# Altium PCB TSAL_Dummy.PcbDoc
Units mm, origin at the board's own origin, x right, y up, seen from the top; angles counter-clockwise.
Board outline 40.03 x 40.03 mm, 2 copper layers (Top Layer, Bottom Layer), stack 1.57 mm thick; 28 components, 20 nets, 72 pads, 4 vias.
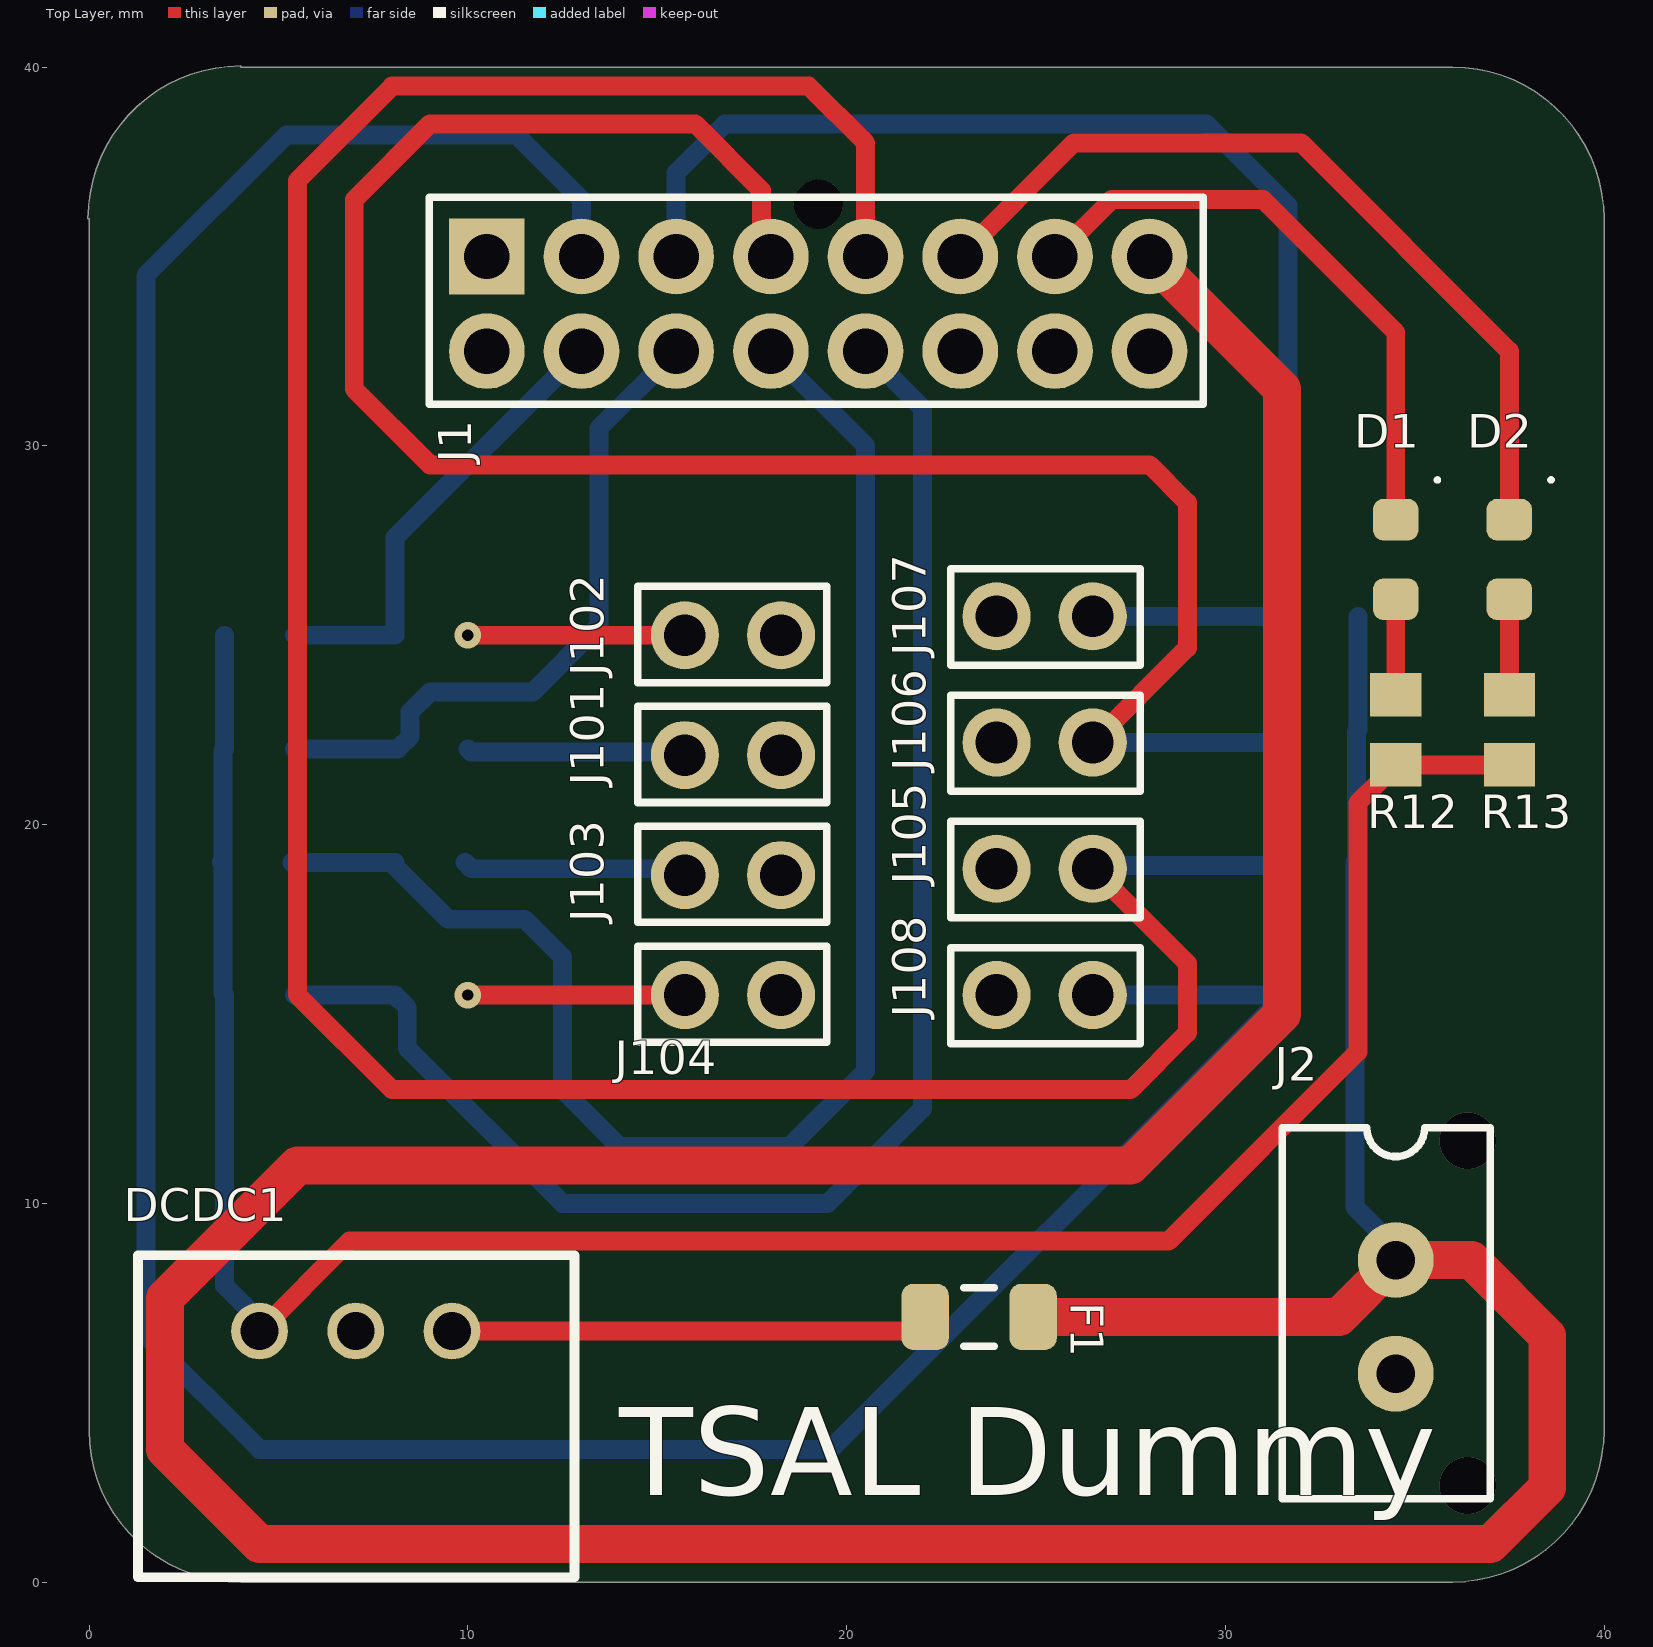
[diagram p0: Top Layer view]
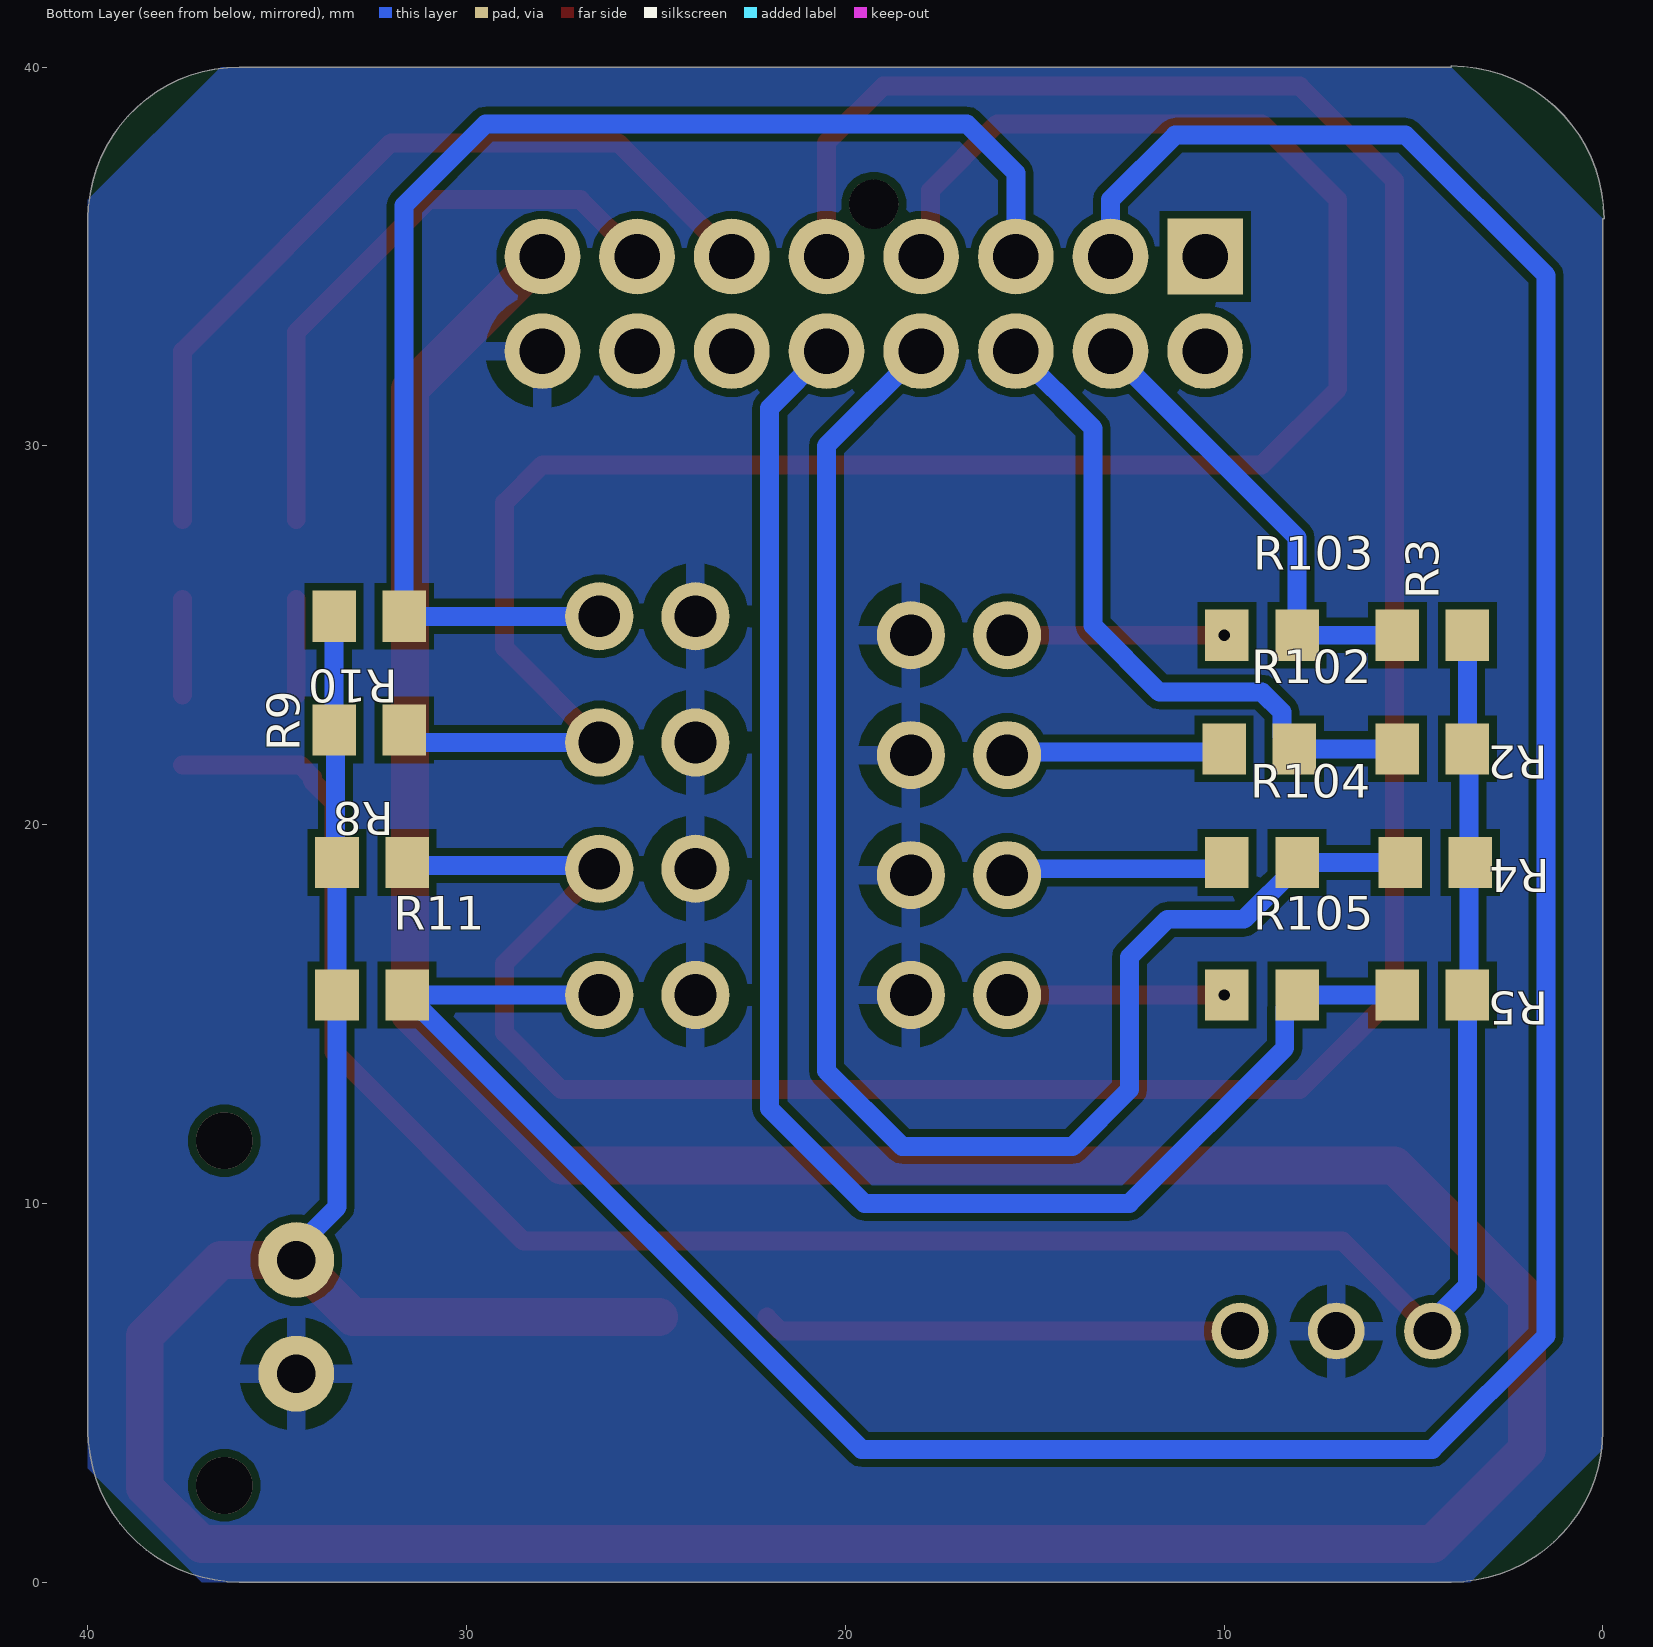
[diagram p1: Bottom Layer view, seen from below]
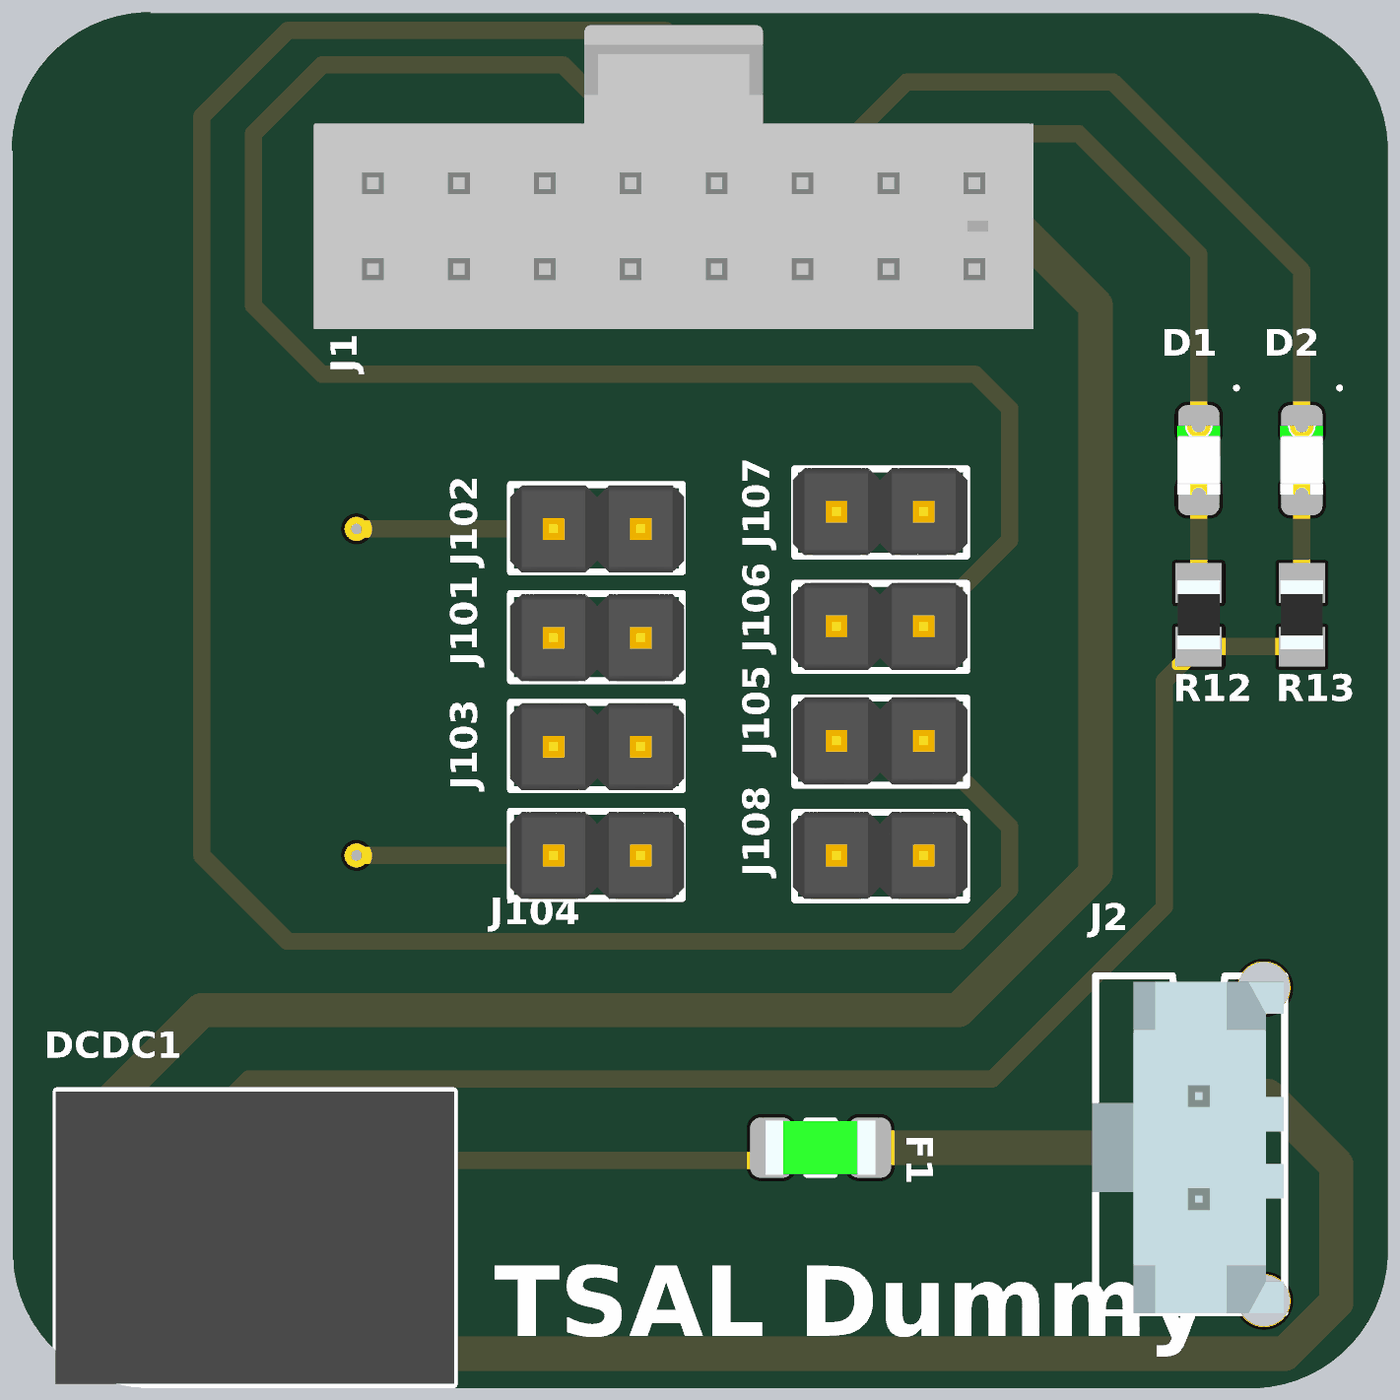
[diagram p2: 3D render of the assembled board from above, using the file's embedded part models]
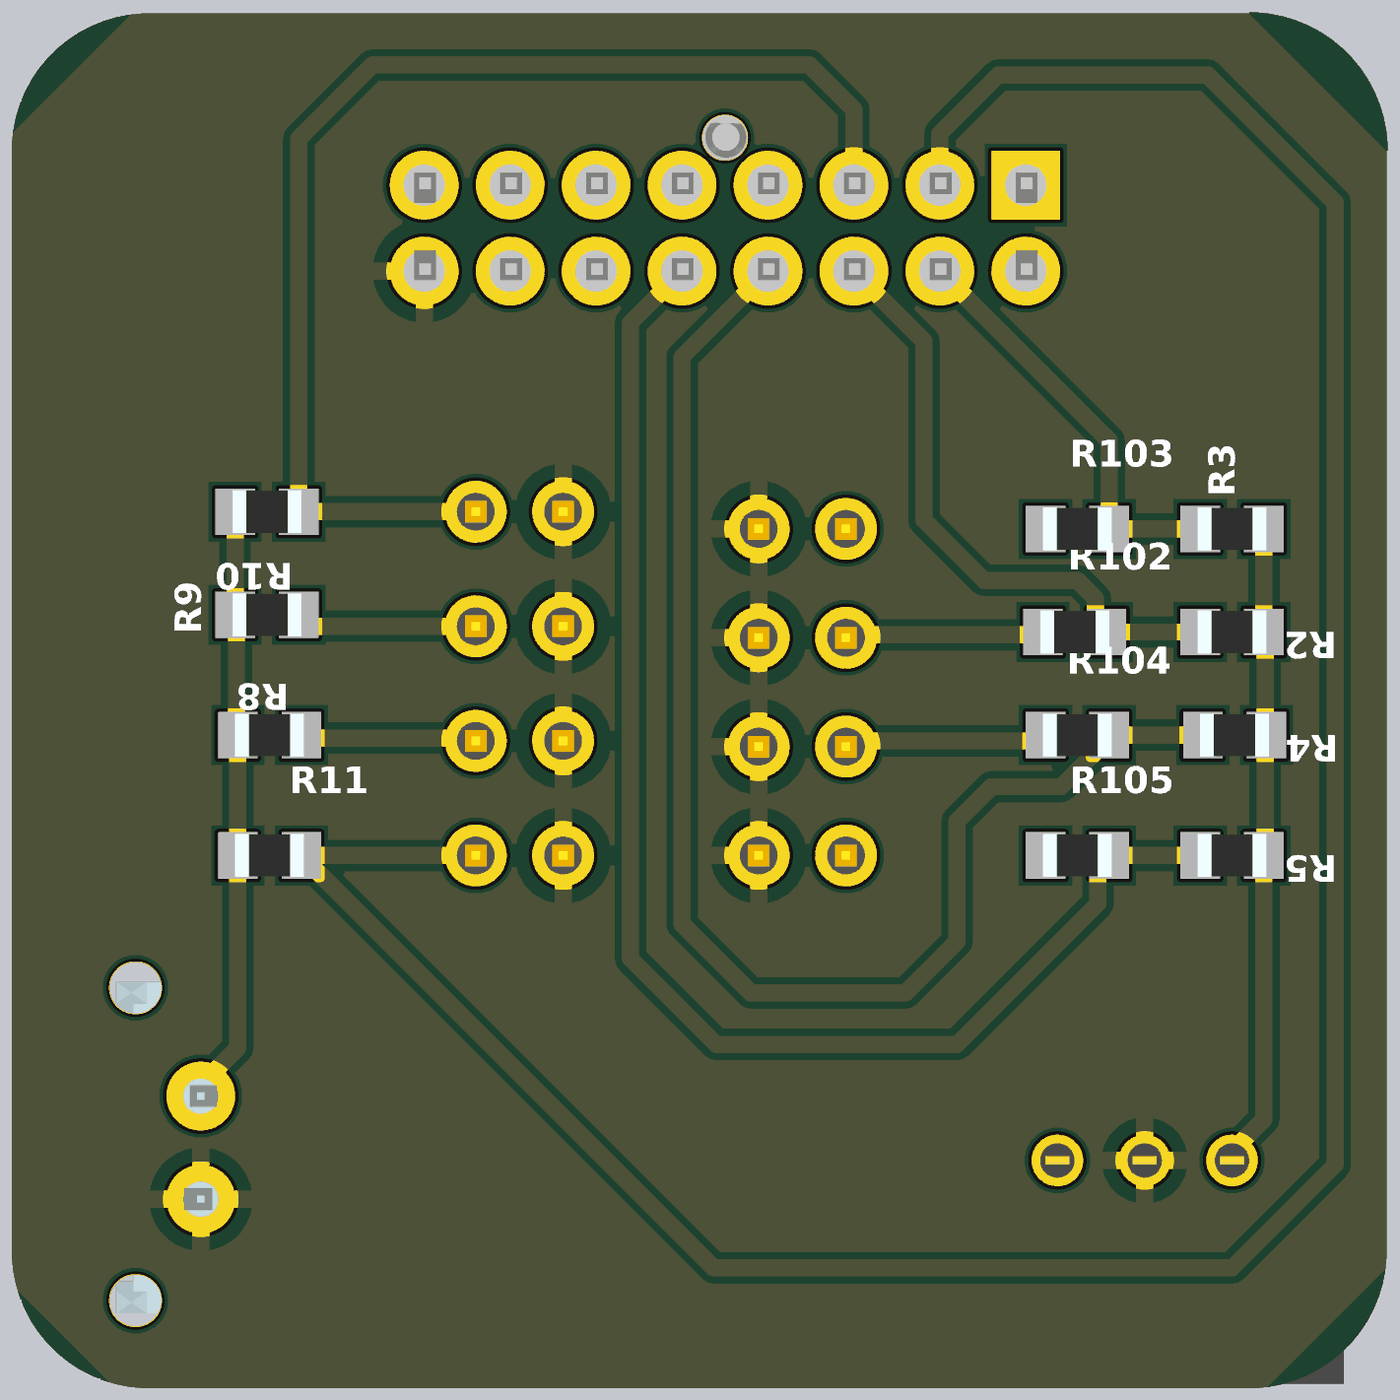
[diagram p3: 3D render of the assembled board from below, using the file's embedded part models]

## Layer stack, top to bottom
Top Solder: solder mask 0.01, Solder Resist, Dk 3.5
Top Layer: signal copper 0.035
Dielectric 1: dielectric 1.5, FR-4, Dk 4.8
Bottom Layer: signal copper 0.035
Bottom Solder: solder mask 0.01, Solder Resist, Dk 3.5

## Board outline
0,4 0,36 -0.031,36 cw(c4,36) 4,40.031 4,40 36,40 cw(c36,36) 40,36 40,4 cw(c36,4) 36,0 4,0 cw(c4,4)

## Design rules (kind name [scope] priority, off if disabled: settings)
Clearance [All] p1: gap=0.2 ignorepadtopadclearanceinfootprint=FALSE
HoleSize [All] p1: absolutevalues=TRUE maxlimit=5 minlimit=0.2 maxpercent=80.000 minpercent=20.000
PolygonConnect [All] p1: connectstyle=Relief reliefconductorwidth=0.5 reliefentries=4 polygonreliefangle="90 Angle" airgapwidth=0.5
RoutingVias [All] p1: holewidth=0.3 width=0.7 viastyle="Through Hole" minholewidth=0.2 minwidth=0.5 maxholewidth=3 maxwidth=7
SolderMaskExpansion [All] p1: expansion=0.102 istentingtop=FALSE
Width [All] p1: maxlimit=5 minlimit=0.2 preferedwidth=0.5
29 further rules are at their usual default settings.

## Components (designator, comment, footprint, x,y, rotation, side; value= is the part's Value field where it differs from the comment)
D1 "150080VS75000" LED_0805_WE 34.5,27 r270 top
D2 "150080RS75000" LED_0805_WE 37.5,27 r270 top
DCDC1 "173951236" DCDC_Magi3c 7.04,6.627 r0 top
F1 "0437001.WRA" Fuse_1206 23.5,7 r180 top
J1 "1053101116" J_NanoFit_2x8_V 19.25,30.13 r0 top
J2 "436500215" J_MicroFit_2x1 34.5,8.5 r90 top
J101 "61300211121" J_Pinheader_1x2 17,21.833 r0 top
J102 "61300211121" J_Pinheader_1x2 17,25 r0 top
J103 "61300211121" J_Pinheader_1x2 17,18.667 r0 top
J104 "61300211121" J_Pinheader_1x2 17,15.5 r0 top
J105 "61300211121" J_Pinheader_1x2 25.23,18.833 r180 top
J106 "61300211121" J_Pinheader_1x2 25.23,22.167 r180 top
J107 "61300211121" J_Pinheader_1x2 25.23,25.5 r180 top
J108 "61300211121" J_Pinheader_1x2 25.23,15.5 r180 top
R2 "CR0805-JW-103ELF" R0805FTK 4.5,22 r180 bottom
R3 "CR0805-JW-103ELF" R0805FTK 4.5,25 r180 bottom
R4 "CR0805-JW-103ELF" R0805FTK 4.425,19 r180 bottom
R5 "CR0805-JW-103ELF" R0805FTK 4.5,15.5 r180 bottom
R8 "CR0805-JW-103ELF" R0805FTK 32.5,19 r0 bottom
R9 "CR0805-JW-103ELF" R0805FTK 32.575,22.5 r0 bottom
R10 "CR0805-JW-103ELF" R0805FTK 32.575,25.5 r0 bottom
R11 "CR0805-JW-103ELF" R0805FTK 32.5,15.5 r0 bottom
R12 "CR0805-JW-103ELF" R0805FTK 34.5,22.5 r270 top
R13 "CR0805-JW-103ELF" R0805FTK 37.5,22.5 r270 top
R102 "CR0805-JW-103ELF" R0805FTK 9.075,22 r180 bottom
R103 "CR0805-JW-103ELF" R0805FTK 9,25 r180 bottom
R104 "CR0805-JW-103ELF" R0805FTK 9,19 r180 bottom
R105 "CR0805-JW-103ELF" R0805FTK 9,15.5 r180 bottom

## Footprints (in the part's own frame and the unit in brackets; to place one, negate y for a bottom-side part, rotate by r counter-clockwise, add the part's x,y. Pads: shape width x height; smd on the part's side, far side on the other; paste and mask are expansions set on the pad)
DCDC_Magi3c [mm]
  round 1.5 hole 1: 1(2.54,0) 2(0,0) 3(-2.54,0)
  silkscreen extent -5.75,-6.5 5.77,2, body extent -5.8,-6.5 5.8,2, height 10.2
Fuse_1206 [mm] "Chip Resistor, 2-Leads, Body 3,20x1,58mm, IPC Medium Density"
  rrect50% 1.25x1.75 smd: 1(-1.425,0) 2(1.425,0)
  silkscreen extent -0.4,-0.78 0.4,0.77, body extent -1.6,-0.79 1.6,0.79, height 0.86
J_MicroFit_2x1 [mm]
  round 2 hole 1.02: 1(0,0) 2(-3,0)
  silkscreen extent -6.3,-2.5 3.5,3, body extent -6.32,-2.47 3.32,3.1, height 10
J_NanoFit_2x8_V [mm]
  round 2 hole 1.2: 1(8.75,4.869) 2(6.25,4.869) 3(3.75,4.869) 4(1.25,4.869) 5(-1.25,4.869) 6(-3.75,4.869) 7(-6.25,4.869) 9(8.75,2.37) 10(6.25,2.37) 11(3.75,2.37) 12(1.25,2.37) 13(-1.25,2.37) 14(-3.75,2.37) 15(-6.25,2.37) 16(-8.75,2.37)
  rect 2x2 hole 1.2: 8(-8.75,4.869)
  round 1.3 hole 1.3: ""(0,6.25)
  silkscreen extent -10.27,0.97 10.17,6.43, body extent -10.5,0.68 10.44,9.53, height 10.18
J_Pinheader_1x2 [mm]
  round 1.8 hole 1.1: 1(-1.27,0) 2(1.27,0)
  silkscreen extent -2.52,-1.25 2.48,1.29, body extent -2.54,-1.27 2.54,1.27, height 9.5
LED_0805_WE [mm] "SODFL, 2-Leads, Body 1,60x3,20mm, IPC Medium Density"
  rrect50% 1.1x1.2 smd: A(1.05,0) K(-1.05,0)
  silkscreen extent -2.15,1.05 -2.05,1.15, body extent -1,-0.62 1,0.63, height 0.7
R0805FTK [mm] "Chip Resistor, 2-Leads, Body 2,00x1,25mm, IPC Medium Density"
  rect 1.15x1.35 smd: 1(-0.925,0) 2(0.925,0)
  body extent -1,-0.63 1,0.63, height 0.65

## Part data
D1: library part LEDVS-0805-40, "Led, Green, 570 Nm, 2 V, 30 Ma, 40 Mcd Rohs Compliant: Yes", Case Code (Imperial)=0805, Case Code (Metric)=2012, Color=Green, Forward Current=30mA, Forward Voltage=2V, Manufacturer 1="Wurth Electronics", Max Operating Temperature=85°C, Min Operating Temperature=-40°C, Package Quantity=4000, Supplier Part Number 1=8154237, Test Current=20mA, .Creator=DR, Case/Package=0805, Category=LEDs, ComponentLink1Description=Datasheet, ComponentLink1URL=https://www.we-online.com/catalog/datasheet/150080VS75000.pdf, ComponentLink2Description="Where buy it", ComponentLink2URL=https://katalog.we-online.de/en/led/WL-SMCW/150080VS75000, ComponentLink3Description=https://datasheet.ciiva.com/22656/150080vs75000-22656966.pdf?src-supplier=Element14, ComponentLink3URL=https://datasheet.ciiva.com/22656/150080vs75000-22656966.pdf?src-supplier=Element14, ComponentLink4Description=https://datasheet.ciiva.com/29279/759437-da-01-en-chipled-0805-w-kl-h-gruen-150080vs7500-29279047.pdf?src-supplier=Conrad, ComponentLink4URL=https://datasheet.ciiva.com/29279/759437-da-01-en-chipled-0805-w-kl-h-gruen-150080vs7500-29279047.pdf?src-supplier=Conrad, ComponentLink5Description=https://datasheet.ciiva.com/29563/150080vs75000-29563018.pdf?src-supplier=Digi-Key, ComponentLink5URL=https://datasheet.ciiva.com/29563/150080vs75000-29563018.pdf?src-supplier=Digi-Key, Dominant Wavelength=570nm, Height=0.7mm, Length=2mm, Lens Style=Clear,Rectangular, Luminous Intensity=40mcd, Manufacturer Part Number 1=150080VS75000, Mount="Surface Mount", Packaging="Tape and Reel", Pricing 1="50=0,19300, 500=0,12900, 1000=0,12300, 2000=0,11700, 4000=0,11100 (USD)", REACH SVHC=Unknown, RoHS=Yes, Stock 1=850, Supplier 1=RSComponents, Viewing Angle=140°, Wavelength=570nm, Width=1.25mm
D2: library part LEDRS-0805-150, "0805(H=0.8mm) 红色 高亮 λD=625nm VF=2V IF=30mA PD=72mW", Case Code (Imperial)=0805, Case Code (Metric)=2012, Color=Red, Forward Current=30mA, Forward Voltage=2V, Manufacturer 1="Wurth Electronics", Max Operating Temperature=85°C, Min Operating Temperature=-40°C, Package Quantity=4000, Supplier Part Number 1=8154225P, Test Current=20mA, .Creator=DR, Case/Package=0805, Category=LEDs, ComponentLink1Description=Datasheet, ComponentLink1URL=https://www.we-online.com/catalog/datasheet/150080RS75000.pdf, ComponentLink2Description="Where buy it", ComponentLink2URL=https://katalog.we-online.de/en/led/WL-SMCW/150080RS75000, ComponentLink3Description=https://datasheet.ciiva.com/22656/150080rs75000-22656961.pdf?src-supplier=Element14, ComponentLink3URL=https://datasheet.ciiva.com/22656/150080rs75000-22656961.pdf?src-supplier=Element14, ComponentLink4Description=https://datasheet.ciiva.com/29279/759435-da-01-en-chipled-0805-w-kl-rot-150080rs75000-29279032.pdf?src-supplier=Conrad, ComponentLink4URL=https://datasheet.ciiva.com/29279/759435-da-01-en-chipled-0805-w-kl-rot-150080rs75000-29279032.pdf?src-supplier=Conrad, Dominant Wavelength=625nm, Height=0.7mm, Length=2mm, Lens Style=Clear,Rectangular, Luminous Intensity=150mcd, Manufacturer Part Number 1=150080RS75000, Mount="Surface Mount", Packaging="Tape and Reel", Pricing 1="50=0,19300, 500=0,12900, 1000=0,12300, 2000=0,11700, 4000=0,11100 (USD)", REACH SVHC=Unknown, RoHS=Yes, RoHS Compliant=Yes, Stock 1=1, Supplier 1=RSComponents, Viewing Angle=140°, Wavelength=625nm, Width=1.25mm
DCDC1: library part DCDC-36V/12V-0.5A, "Fdsm Fixed Step Down Regulator M", Manufacturer 1="Wurth Electronics", Supplier Part Number 1=732-173951236-ND, Category="Board Mount Modules", ComponentLink1Description=Datasheet, ComponentLink1URL=https://www.we-online.com/catalog/datasheet/173951236.pdf, Manufacturer Part Number 1=173951236, Pricing 1="1=3,29000, 10=2,99100, 20=2,81300, 30=2,63600, 43=2,39907 (USD)", RoHS=No, Stock 1=32, Supplier 1=Digi-Key
F1: library part Fuse_1A_63V_1206, "Fuse Chip Fast Acting 1A 63V SMD Solder Pad 1206 Ceramic T/R Automotive", Case Code (Imperial)=1206, Case Code (Metric)=3216, Current Rating=1A, Manufacturer=Littelfuse, Max Operating Temperature=150°C, Min Operating Temperature=-55°C, Supplier Part Number 1=F10001CT-ND, Voltage Rating (AC)=63V, .Creator=DO, Approvals=CSA,cURus, Case/Package=1206, Category=Fuses, ComponentLink1Description=https://www.littelfuse.com/~/media/electronics/datasheets/fuses/littelfuse_fuse_437a_datasheet.pdf.pdf?src-supplier=Digi-Key, ComponentLink1URL=https://www.littelfuse.com/~/media/electronics/datasheets/fuses/littelfuse_fuse_437a_datasheet.pdf.pdf?src-supplier=Digi-Key, ComponentLink2Description="Where buy it", ComponentLink2URL=https://www.mouser.es/ProductDetail/Littelfuse/0437001WRA?qs=DXv0QSHKF4z9CJhPXjxR%252BA%3D%3D, Fuse Type="Board Mount (Cartridge Style Excluded)", Manufacturer Part Number=0437001.WRA, Mount="Surface Mount", Packaging="Tape and Reel", Pricing 1="1=1,52000, 5=1,47000, 10=1,37600, 50=1,13860, 100=0,94880, 250=0,92508, 500=0,78276, 1000=0,68788 (USD)", RoHS=Yes, Stock 1=5820, Supplier 1=Digi-Key
J1: library part J_NanoFit_2x8_V, "Nano-Fit Vertical Header Through Hole 2.50mm Pitch Dual Row 16 Circuits with Kinked Pins Tin (Sn) Plating Black", Insulation Color=Black, Manufacturer 1=Molex, Manufacturer Part Number 1=105310-1116, Max Operating Temperature=105°C, Min Operating Temperature=-40°C, Supplier Part Number 1=WM16885-ND, .Creator=AC, Category="Headers and Wire Housings", ComponentLink1Description=https://www.molex.com/pdm_docs/sd/1053101210_sd.pdf?src-supplier=Digi-Key, ComponentLink1URL=https://www.molex.com/pdm_docs/sd/1053101210_sd.pdf?src-supplier=Digi-Key, ComponentLink2Description=Molex, ComponentLink2URL=https://www.molex.com/molex/products/part-detail/pcb_headers/1053101116, Connector Type="Header,Male Pin", Contact Material=Brass, Contact Plating=Tin, Contact Shape=Square, Fastening Type=Latch, Insulation Material=Polymer, Mount="Through Hole", Number of Positions=16, Number of Rows=2, Packaging=Tray, Pricing 1="1=3,21000, 10=2,82400, 84=2,24619, 1008=1,86110, 4956=1,66858 (USD)", RoHS=No, Stock 1=84, Supplier 1=Digi-Key, Termination="Kinked Pin"
J2: library part J_MicroFit_2x1, "Header 1 Row Vertical Polarizing Peg 2 Pin SMT/Glow Wire Compatible Tin Plate", Manufacturer 1=Molex, Manufacturer Part Number 1=43650-0215, Category="Headers and Wire Housings", ComponentLink1Description=https://datasheet.ciiva.com/19462/884109-19462034.pdf?src-supplier=Jameco, ComponentLink1URL=https://datasheet.ciiva.com/19462/884109-19462034.pdf?src-supplier=Jameco, ComponentLink2Description=https://datasheet.ciiva.com/5157/0436500215-pcb-headers-148687-5157608.pdf?src-supplier=Mouser, ComponentLink2URL=https://datasheet.ciiva.com/5157/0436500215-pcb-headers-148687-5157608.pdf?src-supplier=Mouser, ComponentLink3Description=https://datasheet.ciiva.com/16085/0436500215-pcb-headers-16085668.pdf?src-supplier=Onlinecomponents.com, ComponentLink3URL=https://datasheet.ciiva.com/16085/0436500215-pcb-headers-16085668.pdf?src-supplier=Onlinecomponents.com, ComponentLink4Description=https://datasheet.ciiva.com/11748/0900766b80307ce2-11748388.pdf?src-supplier=RSComponents, ComponentLink4URL=https://datasheet.ciiva.com/11748/0900766b80307ce2-11748388.pdf?src-supplier=RSComponents, ComponentLink5Description=https://datasheet.ciiva.com/9432/0436500215-pcb-headers-9432850.pdf?src-supplier=Avnet, ComponentLink5URL=https://datasheet.ciiva.com/9432/0436500215-pcb-headers-9432850.pdf?src-supplier=Avnet, ComponentLink6Description=https://datasheet.ciiva.com/7920/1889390-7920892.pdf?src-supplier=Element14, ComponentLink6URL=https://datasheet.ciiva.com/7920/1889390-7920892.pdf?src-supplier=Element14, Pricing 1="1=0,87800, 10=0,74400, 80=0,63070, 3264=0,47000, 6528=0,45100, 13056=0,41760 (USD)", RoHS=Yes, Stock 1=11086, Supplier 1="Arrow Electronics", Supplier Part Number 1=43650-0215
J101 J102 J103 J104 J105 J106 J107 J108: library part J_Jumper, "CONN HEADER 2 POS 2.54", Color=Black, Current Rating=3A, Manufacturer=Molex, Max Operating Temperature=125°C, Maximum current="3 A", Maximum voltage="250 V AC", Min Operating Temperature=-40°C, Supplier Part Number 1=8281581, Temperature rating="-40° to +105°C", Voltage Rating=250V, .Creator=GP, Application=Shortcircuit, Category=Connector, Category type=PCB-PCB, ComponentLink1Description=Datasheet, ComponentLink1URL=https://www.we-online.com/catalog/datasheet/61300211121.pdf, ComponentLink2Description="Where buy it", ComponentLink2URL=https://www.we-online.com/catalog/en/PHD_2_54_THT_PIN_HEADER_6130XX11121?sq=61300211121&sp=https%3A%2F%2Fwww.we-online.com%2Fweb%2Fen%2Fwuerth_elektronik%2Fsearchpage.php%3Fsearch%3D61300211121#61300211121, ComponentLink3Description=https://datasheet.ciiva.com/13619/6130xx11121-48870-13619345.pdf?src-supplier=Mouser, ComponentLink3URL=https://datasheet.ciiva.com/13619/6130xx11121-48870-13619345.pdf?src-supplier=Mouser, Connections=1x2, Connector Type="Male Pin", Contact Gender=Male, Contact Material="Copper Alloy,Copper", Contact Mating Length=0.236inch, Contact Plating=Gold, Flammability=94V-0, Gender=Male, Housing Material=PBT, Lead Free="Lead Free", Manufacturer Part Number=61300211121, Mount="Through hole", Number of Contacts=2, Number of Positions=2, Number of Rows=1, Orientation=Vertical, Packaging=Bulk, Pitch=0.1inch, Pricing 1="5=0,14100, 50=0,09700, 100=0,07800, 200=0,07300, 500=0,06800 (USD)", Product name="Pin Header", REACH SVHC=Unknown, Stock 1=1855, Supplier="Würth Elektronik", Supplier 1=RSComponents, Termination="Through Hole"
R2 R3 R4 R5 R8 R9 R10 R11 R12 R13 R102 R103 R104 R105: library part R10k-0805FTK, "BOURNS         CR0805-JW-103ELF            Surface Mount Chip Resistor, Thick Film, CR Series, 10 kohm, 125 mW,  5%, 150 V", Case Code (Imperial)=0805, Case Code (Metric)=2012, Manufacturer 1=Bourns, Max Operating Temperature=155°C, Max power dissipation=125mW, Min Operating Temperature=-55°C, Package Quantity=1, Resistance=10kR, Resistance Tolerance=5%, Resistor Type="Thick Film", Temperature Coefficient=200ppm/°C, Voltage Rating=150V, Voltage Rating (DC)=100V, .Creator=DR, Case/Package=0805, Category="Chip SMD Resistors", ComponentLink1Description=https://datasheet.ciiva.com/11821/0900766b80fcdb72-11821135.pdf?src-supplier=RSComponents, ComponentLink1URL=https://datasheet.ciiva.com/11821/0900766b80fcdb72-11821135.pdf?src-supplier=RSComponents, ComponentLink2Description=https://datasheet.ciiva.com/9122/chpreztr-9122374.pdf?src-supplier=Avnet, ComponentLink2URL=https://datasheet.ciiva.com/9122/chpreztr-9122374.pdf?src-supplier=Avnet, ComponentLink3Description=https://datasheet.ciiva.com/22693/1902866-22693254.pdf?src-supplier=Element14, ComponentLink3URL=https://datasheet.ciiva.com/22693/1902866-22693254.pdf?src-supplier=Element14, ComponentLink4Description=https://datasheet.ciiva.com/7986/691949-7986187.pdf?src-supplier=Element14, ComponentLink4URL=https://datasheet.ciiva.com/7986/691949-7986187.pdf?src-supplier=Element14, ComponentLink5Description=https://datasheet.ciiva.com/30065/159chpreztr-30065976.pdf?src-supplier=Onlinecomponents.com, ComponentLink5URL=https://datasheet.ciiva.com/30065/159chpreztr-30065976.pdf?src-supplier=Onlinecomponents.com, ComponentLink6Description=https://datasheet.ciiva.com/16783/70154685-16783482.pdf?src-supplier=Allied+Electronics, ComponentLink6URL=https://datasheet.ciiva.com/16783/70154685-16783482.pdf?src-supplier=Allied+Electronics, ComponentLink7Description=https://datasheet.ciiva.com/5548/chpreztr-5548491.pdf?src-supplier=Mouser, ComponentLink7URL=https://datasheet.ciiva.com/5548/chpreztr-5548491.pdf?src-supplier=Mouser, ComponentLink8Description=https://datasheet.ciiva.com/6559/chpreztr-6559900.pdf?src-supplier=Digi-Key, ComponentLink8URL=https://datasheet.ciiva.com/6559/chpreztr-6559900.pdf?src-supplier=Digi-Key, ComponentLink9Description=https://datasheet.ciiva.com/6559/chpreztr-6559901.pdf?src-supplier=Digi-Key, ComponentLink9URL=https://datasheet.ciiva.com/6559/chpreztr-6559901.pdf?src-supplier=Digi-Key, ComponentLink10Description=https://datasheet.ciiva.com/7985/1856384-7985869.pdf?src-supplier=Element14, ComponentLink10URL=https://datasheet.ciiva.com/7985/1856384-7985869.pdf?src-supplier=Element14, ComponentLink11Description=https://datasheet.ciiva.com/48692/001055517-da-01-en-smd-wid-cr0805-jw-103elf-10k-ohm-1-8w-48692118.pdf?src-supplier=Conrad, ComponentLink11URL=https://datasheet.ciiva.com/48692/001055517-da-01-en-smd-wid-cr0805-jw-103elf-10k-ohm-1-8w-48692118.pdf?src-supplier=Conrad, Construction=Rectangular, Contact Plating=Tin, Depth=1.25mm, Features="Moisture Resistant", Height=0.5mm, Length=2mm, Manufacturer Part Number 1=CR0805-JW-103ELF, Military Standard=Not, Mount="Surface Mount", Number of Pins=2, Number of Terminations=2, Packaging="Tape and Reel", Power rating=125mW, Pricing 1="1=0,05790, 10=0,01540, 25=0,01340, 100=0,00340 (USD)", Radiation Hardening=No, REACH SVHC="No SVHC", RoHS=Yes, RoHS Compliant=Yes, Series=CR0805, Stock 1=57566, Supplier 1="Arrow Electronics", Supplier Part Number 1=CR0805-JW-103ELF, Technology="THICK FILM", Termination=SMD/SMT, Thickness=508um, Tolerance=5%, Width=1.25mm

## Via types
v1: diameter 0.7, hole 0.3, Top Layer to Bottom Layer, 2 vias
v2: diameter 1.5, hole 1.5, Top Layer to Bottom Layer, 2 vias

## Nets (pads, with @x,y where several pads share a name; then routed paths per layer and width w, separated by ;. In a path a pad name is that pad's centre, name@x,y a point inside that pad or via, vN(x,y) a via of type N, cw(c..) or ccw(c..) an arc to the next point about the centre after c; other vN are vias at no path point)
+12: DCDC1.3 R2.2 R3.2 R4.2 R5.2 R12.2 R13.2 | length 61.9
  Top Layer w0.5: DCDC1.3 6.873,9 28.5,9 33.5,14 33.5,20.575 34.075,21.15 34.075,21.25 34.4,21.575 R13.2
  Bottom Layer w0.5: R3.2 R2.2 3.538,21.962 3.538,19.038 R4.2 3.538,18.962 3.538,15.538 R5.2 3.575,7.823 4.5,6.898 DCDC1.3
AIR+_Coil_1: J1.4 J105.1 R8.1 | length 76.8
  Top Layer w0.5: J1.4 20.5,38 19,39.5 8,39.5 5.5,37 5.5,15.5 8,13 27.5,13 29,14.5 29,16.333 J105.1
  Bottom Layer w0.5: J105.1 26.583,18.917 31.492,18.917 R8.1
AIR+_State: J1.12 R5.1 R105.2 | length 41.1
  Bottom Layer w0.5: R5.1 R105.2 8.4,15.175 8.4,14.1 12.5,10 19.5,10 22,12.5 22,31 J1.12
AIR-_Coil_1: J1.5 J106.1 R9.1 | length 55.1
  Top Layer w0.5: J1.5 17.75,35.25 17.75,36.75 16,38.5 9,38.5 7,36.5 7,31.5 9,29.5 28,29.5 29,28.5 29,24.667 J106.1
  Bottom Layer w0.5: J106.1 31.325,22.167 31.65,22.492 R9.1
AIR-_State: J1.13 R4.1 R104.2 | length 41.2
  Bottom Layer w0.5: R4.1 R104.2 8.075,18.9 9.475,17.5 11.5,17.5 12.5,16.5 12.5,13 14,11.5 18.5,11.5 20.5,13.5 20.5,30 J1.13
GND: DCDC1.2 J1.9 J2.2 J101.2 J102.2 J103.2 J104.2 J105.2 J106.2 J107.2 J108.2
Green_LEDs: D1.K J1.2 | length 16
  Top Layer w0.5: J1.2 27,36.5 31,36.5 34.5,33 D1.K
HV_Accumulator_State: J1.15 R3.1 R103.2 | length 12.2
  Bottom Layer w0.5: R3.1 R103.2 8.075,27.575 J1.15
LV+_in: F1.1 J1.1 J2.1 R8.2 R9.2 R10.2 R11.2 | length 132.7
  Top Layer w1: F1.1 33,7 J2.1 36.5,8.5 38.5,6.5 38.5,2.5 37,1 4.5,1 2,3.5 2,7.5 5.5,11 27.5,11 31.5,15 31.5,31.5 J1.1
  Bottom Layer w0.5: R10.2 R9.2 33.463,22.463 33.463,19.038 R8.2 R11.2 33.425,9.9 34.5,8.825 J2.1
NetD1_A: D1.A R12.1 | length 2.5
  Top Layer w0.5: R12.1 D1.A
NetD2_A: D2.A R13.1 | length 2.5
  Top Layer w0.5: R13.1 D2.A
NetDCDC1_1: DCDC1.1 F1.2 | length 12.7
  Top Layer w0.5: DCDC1.1 21.705,6.627 22.075,6.997 F1.2
NetJ101_1: J101.1 R102.1 | length 5.8
  Bottom Layer w0.5: R102.1 10.083,21.917 15.647,21.917 J101.1
NetJ102_1: J102.1 R103.1 | length 5.7
  Top Layer w0.5: v1(10,25) J102.1
NetJ103_1: J103.1 R104.1 | length 5.9
  Bottom Layer w0.5: R104.1 10.092,18.833 15.563,18.833 J103.1
NetJ104_1: J104.1 R105.1 | length 5.7
  Top Layer w0.5: v1(10,15.5) J104.1
Precharge_Coil_1: J1.6 J107.1 R10.1 | length 35.8
  Bottom Layer w0.5: J1.6 15.5,37.207 16.793,38.5 29.5,38.5 31.65,36.35 R10.1 J107.1
Precharge_State: J1.14 R2.1 R102.2 | length 17.9
  Bottom Layer w0.5: R2.1 R102.2 8.475,22.325 8.475,22.975 9,23.5 11.707,23.5 13.46,25.253 13.46,30.46 J1.14
Red_LEDs: D2.K J1.3 | length 22.5
  Top Layer w0.5: J1.3 26,38 32,38 37.5,32.5 D2.K
SC_End: J1.7 J108.1 R11.1 | length 84.7
  Bottom Layer w0.5: J1.7 13,36.5 11.293,38.207 5.207,38.207 1.5,34.5 1.5,6.5 4.5,3.5 19.575,3.5 31.15,15.075 31.25,15.075 31.575,15.4 R11.1 J108.1
pads on no net: J1. J1.8 J1.10 J1.11 J1.16
copper on no net:
  other v2: 36.4,2.55 36.4,11.65

## Polygon pours and split planes (outlines as drawn)
GND on Bottom Layer "GND_L02_P000" (solid, pour order 0): 0,36 4,40 36.5,40 40,36.5 40,3 37,0 3.5,0 0,3.5

## Silkscreen, mask and mechanical layers (free items; w line width, h text height)
Top Overlay:
  text "TSAL Dummy" at 14,1.526 h4
Mechanical 1:
  lines w0.5: -0.031,36 cw(c4,36) 4,40.031 ; 0,36 0,4 ccw(c4,4) 4,0 36,0 ccw(c36,4) 40,4 40,36 ccw(c36,36) 36,40 4,40